# Altium PCB OH02B10-FF-Concept.PcbDoc
Units mm, origin at the board's own origin, x right, y up, seen from the top; angles counter-clockwise.
Board outline 2.5 x 2.5 mm, 4 copper layers (L1, L2, L3, L4), stack 0.466 mm thick; 13 components, 9 nets, 42 pads, 29 vias.
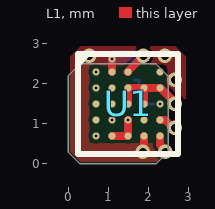
[diagram p0: L1 view]
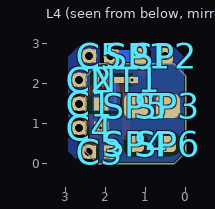
[diagram p1: L4 view, seen from below]
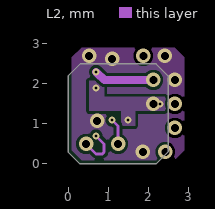
[diagram p2: L2]
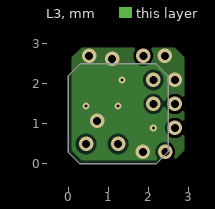
[diagram p3: L3]

## Layer stack, top to bottom
Top Solder: solder mask 0.0178, Solder Resist, Dk 4.1
L1: signal copper 0.0279
Dielectric 2: prepreg 0.0757, FR4 Tg=170, Dk 3.9
L2: signal copper 0.0279
Dielectric 1: core 0.2032, FR4 Tg=170, Dk 4.5
L3: signal copper 0.0279
Dielectric 3: prepreg 0.0757, FR4 Tg=170, Dk 3.9
L4: signal copper 0.0279
Bottom Solder: solder mask 0.0178, Solder Resist, Dk 4.1

## Board outline
0,0.3 0,2.2 0.3,2.5 2.2,2.5 2.5,2.2 2.5,0.3 2.2,0 0.3,0

## Design rules (kind name [scope] priority, off if disabled: settings)
AssemblyTestpoint [(IsPad And (OnTopLayer Or OnBottomLayer)) Or (IsVia) Or (IsPad And OnMultiLayer)] p1: testpointundercomponent=TRUE minsize=0.9 maxsize=2.5 preferedsize=1 minholesize=0 maxholesize=1 preferedholesize=0.75 testpointgrid=0.025 usegrid=FALSE gridtolerance=0 allowsidetop=TRUE allowsidebottom=TRUE
BoardOutlineClearance BoardOutlineClearanceOuter [OnLayer('L1') Or OnLayer('L4')] p1: gap=0.05 ignorepadtopadclearanceinfootprint=FALSE except(0: Arc-SplitContinuation Track-SplitContinuation SMDPad-SplitContinuation THPad-SplitContinuation Via-SplitContinuation Fill-SplitContinuation Poly-SplitContinuation Region-SplitContinuation Text-SplitContinuation)
BoardOutlineClearance BoardOutlineClearanceInner [OnLayer('L2') Or OnLayer('L3')] p2: gap=0.087 ignorepadtopadclearanceinfootprint=FALSE except(0: Arc-SplitContinuation Track-SplitContinuation SMDPad-SplitContinuation THPad-SplitContinuation Via-SplitContinuation Fill-SplitContinuation Poly-SplitContinuation Region-SplitContinuation Text-SplitContinuation)
Clearance [All] p1: gap=0.075 ignorepadtopadclearanceinfootprint=FALSE except(0: Text-Hole; 0.1: SMDPad-Fill SMDPad-Poly SMDPad-Region THPad-Fill THPad-Poly THPad-Region Fill-Hole Poly-Hole Region-Hole; 0.15: Arc-Hole Track-Hole SMDPad-Hole THPad-Hole)
ComponentClearance ComponentClearance_Wires [ExistsOnLayer('Mechanical 12')] p1: gap=0 collisioncheckmode=3 verticalgap=0 showdistances=FALSE
ComponentClearance [All] p2: gap=0.1 collisioncheckmode=3 verticalgap=0.2 showdistances=FALSE
DiffPairsRouting [All] p1: maxlimit=0.075 minlimit=0.075 mostfreqgap=0.075 toplayer_minwidth=0.075 toplayer_maxwidth=0.075 toplayer_prefwidth=0.075 midlayer1_minwidth=0.075 midlayer1_maxwidth=0.075 midlayer1_prefwidth=0.075 midlayer2_minwidth=0.075 midlayer2_maxwidth=0.075 midlayer2_prefwidth=0.075 bottomlayer_minwidth=0.075 bottomlayer_maxwidth=0.075 bottomlayer_prefwidth=0.075 maxuncoupledlength=3
HoleSize [All] p1: absolutevalues=TRUE maxlimit=5 minlimit=0.062 maxpercent=80.000 minpercent=20.000
HoleToHoleClearance HoleToHoleClearanceLaser12 [InDrillLayerPair('[uVia] L1 - L2') vs InDrillLayerPair('[uVia] L1 - L2')] p1: gap=0.125 allowstackedmicrovias=TRUE
HoleToHoleClearance HoleToHoleClearanceLaser34 [InDrillLayerPair('[uVia] L3 - L4') vs InDrillLayerPair('[uVia] L3 - L4')] p2: gap=0.125 allowstackedmicrovias=TRUE
HoleToHoleClearance HoleToHoleClearanceLaserOnBuried [InDrillLayerPair('[uVia] L1 - L2') Or InDrillLayerPair('[uVia] L3 - L4') vs InDrillLayerPair('L2 - L3')] p3: gap=0 allowstackedmicrovias=TRUE
HoleToHoleClearance HoleToHoleClearanceOthers [All] p4: gap=0.2 allowstackedmicrovias=TRUE
MinimumAnnularRing MinimumAnnularRingDrill [InDrillLayerPair('L1 - L4') Or InDrillLayerPair('L2 - L3')] p1: minimumring=0.075 // mechanical drills need 3 mils per side
MinimumAnnularRing MinimumAnnularRingLaser [InDrillLayerPair('L1 - L2') Or InDrillLayerPair('L3 - L4')] p2: minimumring=0.05 // laser drills need 2 mils per side
MinimumSolderMaskSliver [All] p1: minsoldermaskwidth=0.07
PlaneClearance [All] p1: clearance=0.2
PlaneConnect [All] p1: planeconnectstyle=Direct reliefexpansion=0.5 reliefentries=4 reliefconductorwidth=0.4 reliefairgap=0.25
PolygonConnect [All] p1: connectstyle=Direct reliefconductorwidth=0.4 reliefentries=4 polygonreliefangle="90 Angle" airgapwidth=0.25
RoutingVias [All] p1: holewidth=0.15 width=0.4 viastyle="Through Hole" minholewidth=0.1 minwidth=0.35 maxholewidth=0.75 maxwidth=1 useviatemplates=TRUE viatemplateguid#1={644C5E1A-2154-473F-8E25-44A40552A60B} viatemplateguid#2={6C9C977A-741E-4CC8-9371-468DF4804176} viatemplateguid#3={A5B7A6B6-0F92-48C1-885F-05B4349EF59F} viatemplatename#1=v18h8m0(Tol0-2) viatemplatename#2=v18h8m28mx0(Tol0-2) viatemplatename#3=v36h20m0mx0(Tol5-5)
SilkToSilkClearance [All] p1: silktosilkclearance=0.1
SilkToSolderMaskClearance [IsPad] p1: minsilkscreentomaskgap=0.075 clearancetoexposedcopper=TRUE
SolderMaskExpansion [All] p1: expansion=0.05 istentingtop=FALSE
UnRoutedNet [All] p1: checkbadconnections=TRUE
Width [All] p1: maxlimit=2 minlimit=0.075 preferedwidth=0.1
19 further rules are at their usual default settings.

## Classes and differential pairs
differential pair DIF: +DIF_P -DIF_N

## Components (designator, comment, footprint, x,y, rotation, side; value= is the part's Value field where it differs from the comment)
C1 "GRT033D70J105ME13D" CAPC0603X04L 2.4,1.5 r180 bottom value=1u
C2 "GRT033D70J105ME13D" CAPC0603X04L 2.4,2.1 r0 bottom value=1u
C3 "GRT033D70J105ME13D" CAPC0603X04L 2.15,0.3 r180 bottom value=1u
C4 "GRT033D70J105ME13D" CAPC0603X04L 2.4,0.9 r180 bottom value=1u
C5 "GRT033D70J105ME13D" CAPC0603X04L 2.15,2.7 r0 bottom value=1u
NT1 "NET_TIE" NET_TIE_0.15X0.45MM 1.5,2.1 r180 bottom net-tie
SP1 "V+" SP-0.4x0.4mm 1.175,2.7 r0 bottom
SP2 "V-" SP-0.4x0.4mm 0.525,2.7 r0 bottom
SP3 "G" SP-0.6x0.6mm 0.45,1.45 r0 bottom
SP4 "D+" SP-0.4x0.4mm 1.25,0.5 r180 bottom
SP5 "G" SP-0.6x0.6mm 1.25,1.45 r0 bottom
SP6 "D-" SP-0.4x0.4mm 0.45,0.5 r180 bottom
U1 "OH02B10" BGA24C40P5X5_249X249X52 1.5,1.5 r0 top

## Footprints (in the part's own frame and the unit in brackets; to place one, negate y for a bottom-side part, rotate by r counter-clockwise, add the part's x,y. Pads: shape width x height; smd on the part's side, far side on the other; paste and mask are expansions set on the pad)
BGA24C40P5X5_249X249X52 [mm] "BGA, 24-Leads, Body 2.49x2.49mmx0.52mm, Pitch 0.40mm"
  round 0.18 smd paste-0.01: A1(-0.8,0.8) A2(-0.4,0.8) A3(0,0.8) A5(0.8,0.8) B1(-0.8,0.4) B2(-0.4,0.4) B3(0,0.4) B4(0.4,0.4) B5(0.8,0.4) C1(-0.8,0) C2(-0.4,0) C3(0,0) C4(0.4,0) C5(0.8,0) D1(-0.8,-0.4) D2(-0.4,-0.4) D3(0,-0.4) D4(0.4,-0.4) D5(0.8,-0.4) E1(-0.8,-0.8) E2(-0.4,-0.8) E3(0,-0.8) E4(0.4,-0.8) E5(0.8,-0.8)
  silkscreen extent -1.25,-1.25 1.25,1.25, body extent -1.24,-1.24 1.24,1.24, height 0.52
CAPC0603X04L [mm] "Chip Capacitor, 2-Leads, Body 0.60x0.30mm, IPC High Density"
  rect 0.36x0.32 smd: 1(-0.28,0) 2(0.28,0)
  body extent -0.35,-0.2 0.35,0.2, height 0.39
NET_TIE_0.15X0.45MM [mm] "Net Tie, 0.15 x 0.45 mm"
  rect 0.3x0.15 smd paste-1 mask-1: 1(-0.15,0) 2(0.15,0)
SP-0.4x0.4mm [mm] "Solderpad, 0.4x0.4mm, no paste"
  rrect50% 0.4x0.4 smd paste-2539.97: 1(0,0)
SP-0.6x0.6mm [mm] "Solderpad, 0.6x0.6mm, no paste"
  rrect50% 0.6x0.6 smd paste-2539.97: 1(0,0)

## Part data
C1 C2 C3 C4 C5: library part CMP-001-00049-3, "CAP CER 1UF 6.3V X7T 0201", Rating=6.3V, Tolerance=20%
NT1: library part CMP-077-000001-2, Design Item ID=NET_TIE, Source=Cove-NonComp.SchLib
SP1 SP2 SP3 SP4 SP5 SP6: library part CMP-00022-2, "Solder Pad"
U1: library part CMP-00021-2, "CMOS Image Sensor, Color, 2MP, 1500x1500, 1/7.5\"", Manufacturer 1=Omnivision, Manufacturer Part Number 1=OH02B10-A24A-001A

## Via types
v1: diameter 0.18, hole 0.075, L3 to L4, tented both sides, 8 vias
v2: diameter 0.36, hole 0.2, L1 to L4, tented both sides, 8 vias
v3: diameter 0.18, hole 0.075, L1 to L2, tented top, 7 vias
v4: diameter 0.36, hole 0.2, L2 to L3, tented both sides, 6 vias

## Nets (pads, with @x,y where several pads share a name; then routed paths per layer and width w, separated by ;. In a path a pad name is that pad's centre, name@x,y a point inside that pad or via, vN(x,y) a via of type N, cw(c..) or ccw(c..) an arc to the next point about the centre after c; other vN are vias at no path point)
AGND: C2.2 C3.2 C4.2 C5.2 NT1.2 SP2.1 SP3.1 SP5.1 U1.A2 U1.E4 | length 0.7
  L1 w0.2: U1.A2 v3(1.1,2.625) ; v2(1.87,0.3) 1.9,0.33 U1.E4
  other v1: 2.13,0.9 0.45,1.45 1.25,1.45 1.35,2.1
  other v2: 2.67,2.1 0.525,2.7 2.42,2.7
  other v4: 0.725,1.075 1.1,2.625
AVDD: C2.1 U1.A1 | length 1.5
  L2 w0.2: v3(0.7,2.3) 0.812,2.188 0.819,2.188 0.907,2.1 v4(2.13,2.1)
  other v1: 2.13,2.1
DGND: C1.2 NT1.1 U1.B1 U1.C5 U1.D3 U1.E2 U1.E3 | length 1.9
  L1 w0.2: U1.E2 U1.E3 v3(1.5,1.1)
  L4 w0.075: NT1.1 1.775,2.1 1.775,1.5 C1.2 v1(2.13,1.5)
  other v3: 2.3,1.5 0.7,1.9
  other v4: 2.13,1.5
DIF_N: SP6.1 U1.E1 | length 1.1
  L2 w0.075: v4(0.45,0.5) 0.7,0.25 0.856,0.25 0.9,0.294 0.9,0.5 v3(0.7,0.7)
  other v1: 0.45,0.5
DIF_P: SP4.1 U1.D2 | length 0.7
  L2 w0.075: v3(1.1,1.1) 1.25,0.95 v1(1.25,0.5)
  other v4: 1.25,0.5
DVDD: C1.1 U1.B3 U1.B4 U1.B5 U1.C3 U1.C4 | length 2.2
  L1 w0.2: U1.C3 U1.B3 U1.B4 ; U1.C4 U1.B4 ; v2(2.67,1.5) 2.67,1.537 2.307,1.9 U1.B5 U1.B4
EXT-AVDD: C5.1 SP1.1 U1.A3 | length 1.3
  L1 w0.2: U1.A3 1.48,2.3 v2(1.88,2.7)
  L4 w0.3: SP1.1 C5.1 v2(1.88,2.7)
VH: C4.1 U1.D5 | length 0.5
  L1 w0.2: U1.D5 2.427,1.1 2.627,0.9 v2(2.67,0.9)
VN: C3.1 U1.E5 | length 0.5
  L1 w0.2: U1.E5 2.3,0.473 2.43,0.343 v2(2.43,0.3)
pads on no net: U1.A5 U1.B2 U1.C1 U1.C2 U1.D1 U1.D4

## Polygon pours and split planes (outlines as drawn)
AGND on L4 "AGND_L04_P006" (solid, remove dead copper, pour order 6): 0,0 0,3 3,3 3,0
DGND on L4 "DGND_L04_P001" (solid, remove dead copper, pour order 1): 2.325,1.325 1.65,1.325 1.65,1.675 1.65,2.175 1.875,2.175 1.875,1.825 2.325,1.825
AGND on L2 "AGND_L02_P004" (solid, remove dead copper, pour order 4): 0,0 0,3 3,3 3,0
DGND on L2 "DGND_L02_P000" (solid, remove dead copper, pour order 0): 0.525,2.075 0.525,1.325 1.325,1.325 1.325,0.95 1.675,0.95 1.675,1.325 2.475,1.325 2.475,1.675 0.9,1.675 0.9,2.075
AGND on L1 "AGND_L01_P005" (solid, remove dead copper, pour order 5): 0,0 0,3 3,3 3,0
AGND on L3 "AGND_L03_P002" (solid, remove dead copper, pour order 2): 0,0 0,3 3,3 3,0

## Other copper
L1:
  pour cut-out: 0.535,0.522 0.535,2.465 2.465,2.465 2.465,0.522

## Silkscreen, mask and mechanical layers (free items; w line width, h text height)
Board Outline:
  the board outline again, w0.05
Bottom Assembly:
  lines w0.025: 0.15,1.3 ccw(c0.3,1.3) 0.3,1.15 0.6,1.15 ccw(c0.6,1.3) 0.75,1.3 0.75,1.6 ccw(c0.6,1.6) 0.6,1.75 0.3,1.75 ccw(c0.3,1.6) 0.15,1.6 0.15,1.3 ; 0.25,0.4 ccw(c0.35,0.4) 0.35,0.3 0.55,0.3 ccw(c0.55,0.4) 0.65,0.4 0.65,0.6 ccw(c0.55,0.6) 0.55,0.7 0.35,0.7 ccw(c0.35,0.6) 0.25,0.6 0.25,0.4 ; 0.325,2.6 ccw(c0.425,2.6) 0.425,2.5 0.625,2.5 ccw(c0.625,2.6) 0.725,2.6 0.725,2.8 ccw(c0.625,2.8) 0.625,2.9 0.425,2.9 ccw(c0.425,2.8) 0.325,2.8 0.325,2.6 ; 0.95,1.3 ccw(c1.1,1.3) 1.1,1.15 1.4,1.15 ccw(c1.4,1.3) 1.55,1.3 1.55,1.6 ccw(c1.4,1.6) 1.4,1.75 1.1,1.75 ccw(c1.1,1.6) 0.95,1.6 0.95,1.3 ; 0.975,2.6 ccw(c1.075,2.6) 1.075,2.5 1.275,2.5 ccw(c1.275,2.6) 1.375,2.6 1.375,2.8 ccw(c1.275,2.8) 1.275,2.9 1.075,2.9 ccw(c1.075,2.8) 0.975,2.8 0.975,2.6 ; 1.05,0.4 ccw(c1.15,0.4) 1.15,0.3 1.35,0.3 ccw(c1.35,0.4) 1.45,0.4 1.45,0.6 ccw(c1.35,0.6) 1.35,0.7 1.15,0.7 ccw(c1.15,0.6) 1.05,0.6 1.05,0.4